# EAGLE board CapstoneControllerBoardFINAL (EAGLE 9.2.2)
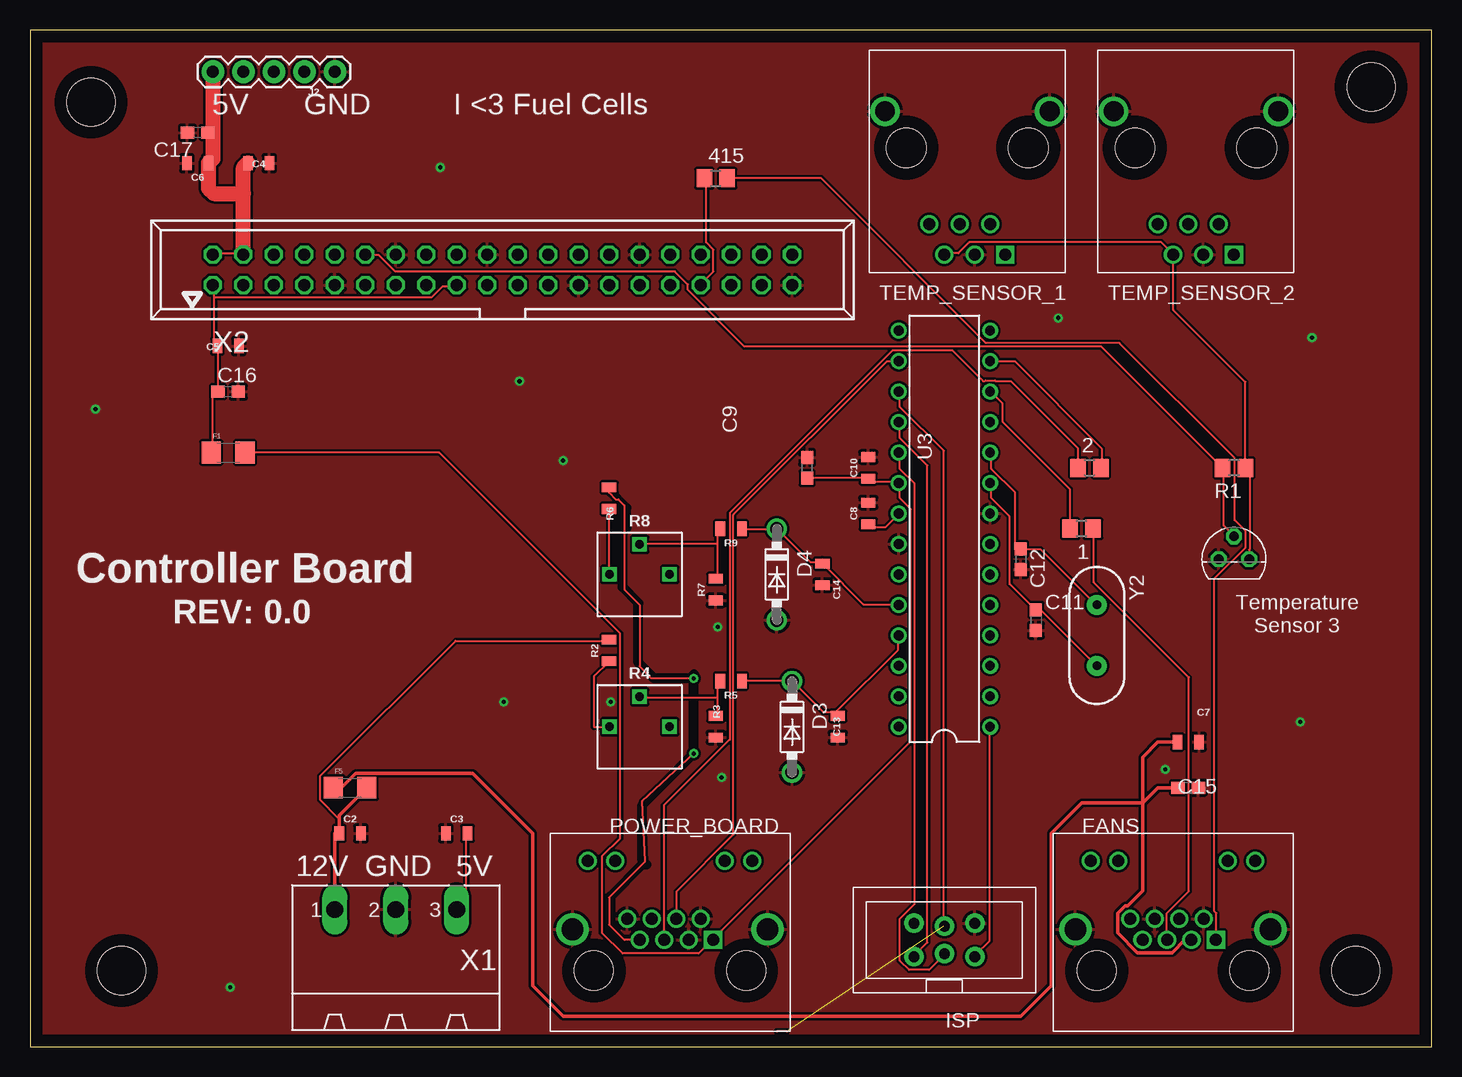
[diagram p0: board, top side]
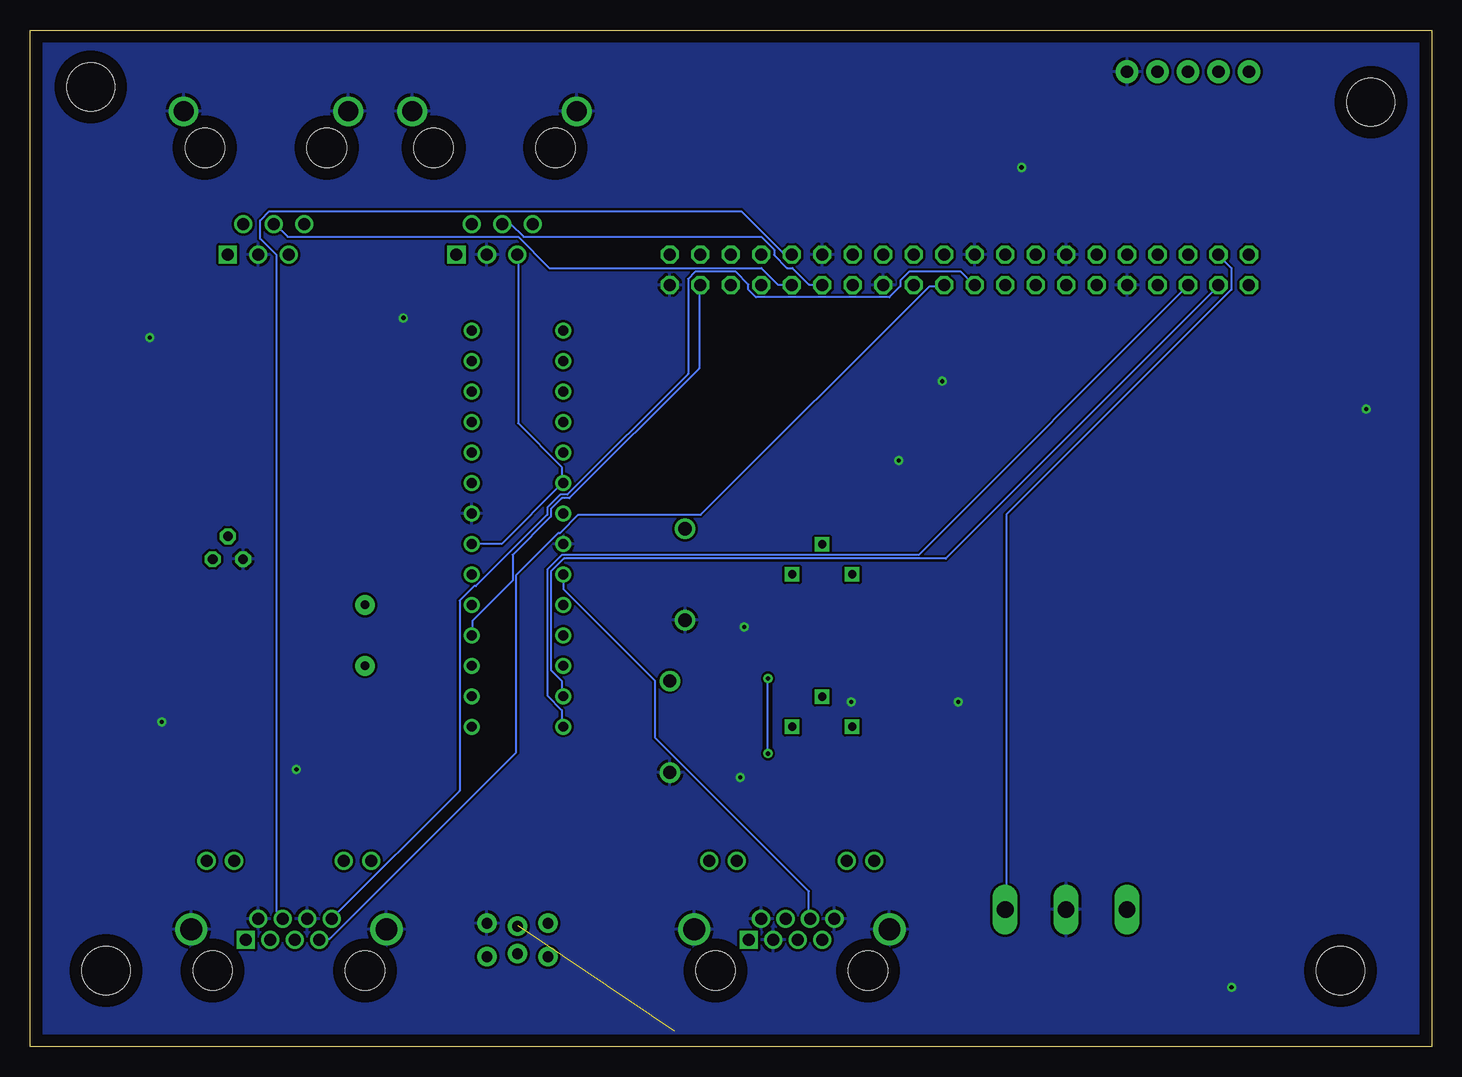
[diagram p1: board, bottom side, seen from below]

Size 116.82 x 84.76 mm. Coordinates in mm from the lower left corner, seen from the top.
Outline: 0,0 116.82,0 116.82,84.76 0,84.76 0,0
Copper layers (1*16): Top 0.035mm / dielectric 1.5mm / Bottom 0.035mm
Design rules "default *": minimum track width 6mil, minimum drill 0.35mm, track to track 8mil, track to pad 8mil, pad to pad 8mil, via to via 8mil, smd to smd 6mil, copper to edge 40mil, drill to drill 6mil, minimum pad ring 10mil, minimum via ring 8mil, stop-mask expansion 4mil, vias tented up to drill 0mil, thermal gap 10mil
Holes 4 mm at 5.08,78.74 7.62,6.35 110.49,6.35 111.76,80.01
tRestrict: 18 lines
bRestrict: 1 lines

## Footprints (pad centres in the part's own frame; a part is rotated, then mirrored left to right if it is on the bottom)
R0805 = smd 1.3 x 1.5: 1 -0.95,0; 2 0.95,0
0805 = smd 0.8 x 1.2: 1 -0.9,0; 2 0.9,0
C0603 = smd 1.1 x 1: 1 -0.85,0; 2 0.85,0
DO41-7.6 = drill 1.1 pad 1.7: A 3.81,0; C -3.81,0
1206 = smd 1.6 x 1.8: 1 -1.4,0; 2 1.4,0
A122645-ND = drill 1 square: P$1 3.58,2.54 | drill 1: P$2 2.56,4.32; P$3 1.54,2.54; P$4 0.52,4.32; P$5 -0.5,2.54; P$6 -1.52,4.32; P$7 -2.54,2.54; P$8 -3.56,4.32; P$9 -6.86,9.14; P$10 -4.57,9.14; P$11 4.57,9.14; P$12 6.86,9.14 | drill 1.8: P$13 -8.13,3.43; P$14 8.13,3.43 | hole 3.25: -6.35,0; 6.35,0
AVRISP-BOX = drill 0.9 pad 1.626: 1 -1.397,2.54; 2 1.397,2.54; 3 -1.143,0; 4 1.143,0; 5 -1.397,-2.54; 6 1.397,-2.54
1X05 = drill 1.016 pad 1.88: 1 0,0; 2 2.54,0; 3 5.08,0; 4 7.62,0; 5 10.16,0
TRIM_POT = drill 0.7 square: 1 -2.5,0; 2 0,2.5; 3 2.5,0
1734723-1_RJ11 = drill 1 square: 1 -3.81,2.54 | drill 1: 2 -2.54,0; 3 -1.27,2.54; 4 0,0; 5 1.27,2.54; 6 2.54,0 | drill 1.65: SH1 -7.5,-9.4; SH2 6.22,-9.4 | hole 3.3: -5.72,-6.35; 4.44,-6.35
PDIP-T28 = drill 0.813 pad 1.2: 1 -16.51,-3.81; 2 -13.97,-3.81; 3 -11.43,-3.81; 4 -8.89,-3.81; 5 -6.35,-3.81; 6 -3.81,-3.81; 7 -1.27,-3.81; 8 1.27,-3.81; 9 3.81,-3.81; 10 6.35,-3.81; 11 8.89,-3.81; 12 11.43,-3.81; 13 13.97,-3.81; 14 16.51,-3.81; 15 16.51,3.81; 16 13.97,3.81; 17 11.43,3.81; 18 8.89,3.81; 19 6.35,3.81; 20 3.81,3.81; 21 1.27,3.81; 22 -1.27,3.81; 23 -3.81,3.81; 24 -6.35,3.81; 25 -8.89,3.81; 26 -11.43,3.81; 27 -13.97,3.81; 28 -16.51,3.81
TO92 = drill 0.813 octagon: 1 -1.27,0; 2 0,1.905; 3 1.27,0
MSTBA3 = drill 1.397 long: 1 -5.08,5.08; 2 0,5.08; 3 5.08,5.08
057-040-1 = drill 1 octagon: 1 -24.13,-1.27; 2 -24.13,1.27; 3 -21.59,-1.27; 4 -21.59,1.27; 5 -19.05,-1.27; 6 -19.05,1.27; 7 -16.51,-1.27; 8 -16.51,1.27; 9 -13.97,-1.27; 10 -13.97,1.27; 11 -11.43,-1.27; 12 -11.43,1.27; 13 -8.89,-1.27; 14 -8.89,1.27; 15 -6.35,-1.27; 16 -6.35,1.27; 17 -3.81,-1.27; 18 -3.81,1.27; 19 -1.27,-1.27; 20 -1.27,1.27; 21 1.27,-1.27; 22 1.27,1.27; 23 3.81,-1.27; 24 3.81,1.27; 25 6.35,-1.27; 26 6.35,1.27; 27 8.89,-1.27; 28 8.89,1.27; 29 11.43,-1.27; 30 11.43,1.27; 31 13.97,-1.27; 32 13.97,1.27; 33 16.51,-1.27; 34 16.51,1.27; 35 19.05,-1.27; 36 19.05,1.27; 37 21.59,-1.27; 38 21.59,1.27; 39 24.13,-1.27; 40 24.13,1.27
HC49US = drill 0.7 pad 1.651: 1 -2.54,0; 2 2.54,0

## Placement (x,y rotation side)
1  110  [R0805]  87.63,43.18 180 top
2  110  [R0805]  88.29,48.26 0 top
415  [R0805]  57.15,72.39 0 top
C2  0.1uF  [0805]  26.67,17.78 0 top
C3  0.1uF  [0805]  35.56,17.78 0 top
C4  0.1uF  [0805]  19.05,73.66 0 top
C5  0.1uF  [0805]  16.51,58.42 0 top
C6  0.1uF  [0805]  13.97,73.66 180 top
C7  0.1uF  [0805]  96.52,25.4 0 top
C8  0.1uF  [0805]  69.85,44.45 90 top
C9  10uF  [C0603]  64.77,48.26 90 top
C10  0.1uF  [0805]  69.85,48.26 90 top
C11  22pF  [C0603]  83.82,35.56 270 top
C12  22pF  [C0603]  82.55,40.64 270 top
C13  0.1uF  [0805]  67.31,26.67 270 top
C14  0.1uF  [0805]  66.04,39.37 270 top
C15  10uF  [C0603]  96.52,21.59 0 top
C16  10uF  [C0603]  16.51,54.61 0 top
C17  10uF  [C0603]  13.97,76.2 180 top
D3  3.3V Zener  [DO41-7.6]  63.5,26.67 270 top
D4  3.3V Zener  [DO41-7.6]  62.23,39.37 270 top
F1  [1206]  16.51,49.53 0 top
F5  [1206]  26.67,21.59 0 top
FANS  ETHERNET  [A122645-ND]  95.25,6.35 0 top
FRAME2  FRAME-LETTERNO_PACKAGE  [DUMMY]  -34.29,115.57 0 top  (outside the outline)
ISP  AVRISP-BOX  [AVRISP-BOX]  76.2,8.89 90 top
J2  [1X05]  25.4,81.28 180 top
POWER_BOARD  ETHERNET  [A122645-ND]  53.34,6.35 0 top
R1  [R0805]  100.33,48.26 180 top
R2  2.4k  [0805]  48.26,33.02 90 top
R3  1.2k  [0805]  57.15,26.67 90 top
R4  0-5k  [TRIM_POT]  50.8,26.67 0 top
R5  5k  [0805]  58.42,30.48 180 top
R6  16k  [0805]  48.26,45.72 90 top
R7  1.3k  [0805]  57.15,38.1 90 top
R8  0-5k  [TRIM_POT]  50.8,39.37 0 top
R9  5k  [0805]  58.42,43.18 180 top
TEMP_SENSOR_1  5555140-6  [1734723-1_RJ11]  77.47,68.58 180 top
TEMP_SENSOR_2  5555140-6  [1734723-1_RJ11]  96.52,68.58 180 top
U3  ATmega328P PDIP  [PDIP-T28]  76.2,43.18 90 top
U$2  DS18B  [TO92]  100.33,40.64 0 top
X1  MSTBA3  [MSTBA3]  30.48,6.35 0 top
X2  057-040-1  [057-040-1]  39.37,64.77 0 top
Y2  [HC49US]  88.9,34.29 270 top

## Library data of the parts
1 2 415 R1 = rcl; SPICEPREFIX: R
C2-C8 C10 C13 C14 = SparkFun-Capacitors; PROD_ID: CAP-11625
C9 C11 C12 C15-C17 ISP = adafruit
D3 D4 R4 R8 U3 = CustomLibrary
F1 F5 = polyfuse
FANS POWER_BOARD = ETHERNET-3
FRAME2 = SparkFun-Aesthetics; DESIGNER: Ben Vandenberg; REV: 0.0; VERSION: v01
J2 = SparkFun-Connectors
R2 R3 R5-R7 R9 = SparkFun-Resistors; PROD_ID: RES-11622
TEMP_SENSOR_1 TEMP_SENSOR_2 = 5555140-6 RJ11
U$2 = temperatureboardElizabeth
X1 = con-phoenix-508; MF: FARNELL; MPN: 1757255; OC_FARNELL: 3705183; OC_NEWARK: 71C4162
X2 = con-panduit; OC_FARNELL: unknown; OC_NEWARK: unknown
Y2 = SparkFun-FreqCtrl

## Nets
3.3V: C9.1 C10.1 F1.2 POWER_BOARD.P$1 R1.1 TEMP_SENSOR_1.5 TEMP_SENSOR_2.5 U3.7 U3.20 U$2.3
12V: C2.1 F5.2 R2.2 X1.1
46V: POWER_BOARD.P$7 R6.2
+5V: C3.2 C4.1 C6.1 C17.1 J2.5 X1.3 X2.2 X2.4
AIR_STARVE_RELAY: 2.1 POWER_BOARD.P$5
DQ_1: TEMP_SENSOR_1.4 X2.29
DQ_2: TEMP_SENSOR_2.4 X2.31
DQ_3: R1.2 U$2.2 X2.12
EXTRA_PIN_1: FANS.P$8 X2.19
EXTRA_PIN_2: FANS.P$7 X2.21
EXTRA_PIN_3: X2.23
FAN_PWM: 415.2 FANS.P$1
FAN_PWM_ATMEL: 1.1 FANS.P$5
FUEL_CELL_CURRENT1: POWER_BOARD.P$6 U3.23
GATE_SIG: POWER_BOARD.P$4 U3.16
GND: C2.2 C3.1 C4.2 C5.2 C6.2 C7.2 C8.2 C9.2 C10.2 C11.2 C12.2 C13.2 C14.2 C15.2 C16.2 C17.2 D3.A D4.A FANS.P$2 FANS.P$6 FANS.P$13 FANS.P$14 ISP.6 J2.1 POWER_BOARD.P$2 POWER_BOARD.P$3 POWER_BOARD.P$8 POWER_BOARD.P$13 POWER_BOARD.P$14 R3.1 R7.1 TEMP_SENSOR_1.3 TEMP_SENSOR_1.SH1 TEMP_SENSOR_1.SH2 TEMP_SENSOR_2.3 TEMP_SENSOR_2.SH1 TEMP_SENSOR_2.SH2 U3.8 U3.22 U$2.1 X1.2 X2.9 X2.14 X2.20 X2.25 X2.30 X2.39
LOAD_ENABLE: U3.4 X2.37
N$1: C8.1 U3.21
N$2: ISP.1 U3.18
N$3: ISP.3 U3.19
N$4: R8.3
N$5: R4.3
N$6: 415.1 X2.33
N$7: R2.1 R4.1
N$8: 1.2 U3.12
N$9: C5.1 C16.1 F1.1 X2.1 X2.17
N$10: R6.1 R8.1
N$11: R3.2 R4.2 R5.2
N$12: ISP.4 U3.17
N$13: C11.1 U3.9 Y2.2
N$14: C12.1 U3.10 Y2.1
N$15: R7.2 R8.2 R9.2
N$16: C7.1 C15.1 F5.1 FANS.P$3
N$17: X2.34
N$18: 2.2 U3.13
RESET: ISP.5 U3.1
SCALED_BATT_V: C13.1 D3.C R5.1 U3.25
SCALED_FUEL_CELL_V: C14.1 D4.C R9.1 U3.24
SCL: U3.28 X2.5
SDA: U3.27 X2.3
VCC: ISP.2
WARNING_LED: FANS.P$4 X2.32

## Tracks (layer width: path | path; a pad name or v marks a point on that pad's centre or on a via)
3.3V
  Top 0.152: 70.22,46.99 C10.1 | C9.1 64.87,47.4 69.75,47.4 C10.1 | C10.1 70.21,47.09 72.34,47.09 U3.20 72.49,46.94 72.49,45.72 73.41,44.81 73.41,25.45 56.95,8.99 POWER_BOARD.P$1 56.79,8.84 55.73,7.77 49.38,7.77 47.65,9.5 47.65,15.85 49.17,17.37 49.17,34.44 34.09,49.53 F1.2 | TEMP_SENSOR_1.5 76.3,66.14 77.37,66.14 78.28,67.06 94.28,67.06 95.2,66.14 TEMP_SENSOR_2.5 95.27,66.02 95.27,61.42 101.28,55.41 R1.1 101.65,47.89 101.65,41.46 101.6,41.41 U$2.3
  Bottom 0.152: U3.7 77.52,41.91 72.49,46.94 U3.20 72.49,47.09 72.49,48.31 76.15,51.97 76.15,65.99 TEMP_SENSOR_1.5
12V
  Top 0.152: 25.4,17.78 C2.1 | R2.2 48.26,33.83 35.46,33.83 24.18,22.55 24.18,20.57 25.71,19.05 25.77,19.05
  Top 0.305: X1.1 25.4,17.78 | C2.1 25.77,19.05 25.77,19.29 F5.2
46V  (via drill 0.35)
  Top 0.152: R6.2 48.26,46.18 48.81,45.63 49.03,45.63 49.53,45.12 49.53,38.1 50.8,36.83 50.8,31.7 51.79,30.71 v55.32,30.71 | POWER_BOARD.P$7 49.53,8.89 48.26,10.16 48.26,12.45 51.26,15.44 51.03,20.47 v55.32,24.43
  Bottom 0.152: v55.32,24.43 v55.32,30.71
+5V
  Top 0.152: C3.2 36.37,17.68 36.37,12.19 35.61,11.43 X1.3 | C17.1 15.24,76.2 | X2.4 17.17,66.14 15.34,66.14 X2.2
  Top 1.27: X2.4 17.78,71.12 | 17.78,71.12 17.78,73.29 C4.1 | 17.78,71.12 15.3,71.12 14.87,71.55 C6.1 15.24,74.03 15.24,76.2 J2.5
  Bottom 0.152: X1.3 35.46,11.43 35.46,44.35 16.71,63.09 16.71,64.92 17.78,65.99 X2.4
AIR_STARVE_RELAY
  Top 0.152: 87.48,48.31 2.1 87.33,48.31 87.33,49.89 81.74,55.47 80.47,55.47 80.4,55.55 79.62,55.55 79.55,55.47 79.43,55.47 76.83,58.06 71.88,58.06 58.32,44.5 58.32,25.6 52.83,20.12 52.83,8.99 POWER_BOARD.P$5
DQ_1
  Bottom 0.152: TEMP_SENSOR_1.4 76.76,68.58 75.69,67.51 55.88,67.51 54.81,66.45 54.81,65.99 53.75,64.92 53.29,64.92 51.92,63.55 50.85,63.55 X2.29
DQ_2
  Bottom 0.152: X2.31 53.44,63.55 54.51,63.55 55.88,64.92 73.56,64.92 76.15,67.51 95.35,67.51 96.42,68.58 TEMP_SENSOR_2.4
DQ_3
  Top 0.152: U$2.2 100.23,42.67 99.47,43.43 99.47,48.16 R1.2 99.31,48.31 89.26,58.37 59.54,58.37 54.81,63.09 54.81,63.55 53.75,64.62 30.43,64.62 29.06,65.99 27.99,65.99 X2.12
EXTRA_PIN_1
  Bottom 0.152: FANS.P$8 91.54,10.82 81.03,21.34 81.03,37.19 79.81,38.41 79.65,38.41 73.71,44.35 73.71,44.96 72.64,46.02 72.03,46.02 61.98,56.08 61.98,64.01 61.37,64.62 58.01,64.62 56.95,63.55 56.95,63.09 56.34,62.48 45.21,62.48 44.3,63.4 44.3,63.86 43.54,64.62 39.27,64.62 38.2,63.55 X2.19
EXTRA_PIN_2
  Bottom 0.152: X2.21 40.64,63.4 41.86,63.4 60.91,44.35 71.12,44.35 72.64,42.82 72.8,42.82 76.3,39.32 76.3,24.54 91.85,8.99 92.61,8.99 FANS.P$7
FAN_PWM
  Top 0.152: 415.2 65.94,72.39 79.65,58.67 90.78,58.67 100.38,49.07 100.38,43.89 101.3,42.98 101.3,41.6 98.7,39.01 98.7,11.28 98.86,11.12 98.86,8.99 FANS.P$1
FAN_PWM_ATMEL
  Top 0.152: 1.1 88.65,43.13 88.65,38.71 96.57,30.79 96.57,12.95 94.74,11.12 94.74,8.99 FANS.P$5
FUEL_CELL_CURRENT1
  Bottom 0.152: U3.23 72.34,39.32 72.34,38.1 64.72,30.48 64.72,25.76 51.92,12.95 51.92,10.82 POWER_BOARD.P$6
GATE_SIG
  Top 0.152: U3.16 71.42,57.15 58.62,44.35 58.62,17.68 53.9,12.95 53.9,10.82 POWER_BOARD.P$4
GND  (via drill 0.35)
  Top 0.152: 34.66,17.81 C3.1
  Bottom 0.152: 49.68,10.65 POWER_BOARD.P$8
  other vias: 57.3,35 57.63,22.45 48.39,28.73 39.47,28.73 44.42,48.87 40.79,55.47 5.46,53.16 94.61,23.11 85.7,60.76 106.83,59.11 105.84,27.08 34.19,73.3 16.69,4.95
  pour Top: -10.16,83.82 -10.16,2.54 -7.62,0 146.05,0 146.05,81.28 142.24,85.09 -8.89,85.09
  pour Bottom: -10.16,86.36 121.92,86.36 125.73,82.55 125.73,1.27 123.19,-1.27 118.11,-6.35 -5.08,-6.35 -10.16,-1.27
LOAD_ENABLE
  Bottom 0.152: U3.4 79.96,34.29 79.96,35.51 76.61,38.86 76.61,41 73.41,44.2 73.41,44.81 72.49,45.72 71.88,45.72 61.06,56.54 61.06,63.4 X2.37
N$1
  Top 0.152: 70.22,43.18 C8.1 70.21,43.28 71.27,43.28 72.34,44.35 U3.21
N$2
  Top 0.152: U3.18 72.49,51.97 72.49,50.75 74.78,48.46 74.78,8.69 73.71,7.62 ISP.1
N$3
  Top 0.152: U3.19 72.49,49.53 72.49,48.16 73.71,46.94 73.71,11.89 72.49,10.67 72.49,7.16 73.25,6.4 74.93,6.4 76.15,7.62 ISP.3
N$6
  Top 0.152: 55.88,72.39 415.1 56.34,72.39 56.34,67.06 56.95,66.45 56.95,64.62 55.88,63.55 X2.33
N$7
  Top 0.152: 48.26,26.71 R4.1 46.99,26.67 46.99,30.85 R2.1
N$8
  Top 0.152: 1.2 86.66,43.28 86.66,46.48 81.03,52.12 81.03,53.65 80.11,54.56 U3.12
N$9
  Top 0.152: 15.61,54.66 C16.1 | C16.1 15.65,54.71 15.65,58.37 C5.1 15.49,58.52 15.34,58.67 15.34,62.48 | F1.1 15.19,49.53 15.19,54.1 15.65,54.56 C16.1 | 15.34,62.48 15.34,63.4 X2.1 | 15.34,62.48 33.48,62.48 34.39,63.4 35.46,63.4 X2.17
N$10
  Top 0.152: 48.26,39.41 R8.1 48.26,39.47 R6.1
N$11
  Top 0.152: 57.25,29.11 57.25,30.33 57.4,30.48 R5.2 | 57.25,29.11 57.25,27.58 R3.2 | 57.25,29.11 50.85,29.11 R4.2
N$12  (1 unrouted)
  Top 0.152: 63.07,1.27 62.23,1.27 | U3.17 72.49,54.56 72.49,53.34 76.15,49.68 76.15,10.06 ISP.4
N$13
  Top 0.152: 83.4,36.83 C11.1 | C11.1 84.24,36.41 | Y2.2 84.23,36.42 C11.1 | U3.9 80.11,46.94 80.11,45.72 81.64,44.2 81.64,38.56 83.46,36.73 C11.1
N$14
  Top 0.152: 82.13,41.49 C12.1 | C12.1 82.55,41.45 84.23,41.45 88.8,36.88 Y2.1 | U3.10 80.11,49.53 80.11,48.16 82.09,46.18 82.09,41.45 C12.1
N$15
  Top 0.152: 57.25,41.91 57.25,42.98 57.4,43.13 R9.2 | 57.25,41.91 57.25,39.01 R7.2 | 57.25,41.91 50.85,41.91 R8.2
N$16
  Top 0.305: F5.1 25.94,21.59 27.14,22.8 36.89,22.8 41.91,17.78 41.91,5.08 44.45,2.54 82.55,2.54 85.09,5.08 85.09,17.78 87.63,20.32 92.71,20.32 | 92.71,20.32 92.71,24.13 93.98,25.4 C7.1 | 92.71,20.32 93.98,21.59 C15.1 | 92.71,20.32 92.71,12.97 91.47,11.73 91.25,11.73 90.63,11.11 90.63,9.47 92.27,7.83 95.19,7.83 96.25,8.89 FANS.P$3
N$18
  Top 0.152: U3.13 82.04,57.15 89.33,49.86 89.33,48.35 2.2
RESET
  Top 0.152: U3.1 79.96,26.67 79.96,8.84 78.74,7.62 ISP.5
SCALED_BATT_V
  Top 0.152: 67.31,27.94 67.31,27.89 | 67.16,27.89 66.09,27.89 D3.C 59.69,30.48 R5.1 | 67.16,27.89 67.31,27.89 | 67.31,27.89 C13.1 67.16,27.89 | 67.16,27.89 72.34,33.07 72.34,34.29 U3.25
SCALED_FUEL_CELL_V
  Top 0.152: 66.04,40.64 C14.1 | R9.1 59.38,43.13 62.13,43.13 D4.C 65.02,40.39 65.94,40.39 C14.1 | U3.24 72.34,36.88 69.44,36.88 66.09,40.23 C14.1
SCL
  Bottom 0.152: U3.28 72.49,26.67 72.49,28.04 73.71,29.26 73.71,39.78 72.49,41 42.77,41 20.37,63.4 X2.5
SDA
  Bottom 0.152: U3.27 72.49,29.26 72.49,30.48 73.41,31.39 73.41,39.62 72.34,40.69 40.49,40.69 17.78,63.4 X2.3
WARNING_LED
  Bottom 0.152: X2.32 53.44,66.14 54.05,66.14 57.56,69.65 96.88,69.65 97.64,68.89 97.64,67.36 96.27,65.99 96.27,11.28 95.81,10.82 FANS.P$4

## Text on the board
tPlace: 5V | GND | I <3 Fuel Cells | Controller Board | REV: 0.0 | Temperature / Sensor 3 | 12V | GND | 5V